# Altium PCB Load_Bank_Switch_New_PCB.PcbDoc
Units mil, origin at the board's own origin, x right, y up, seen from the top; angles counter-clockwise.
Board outline 2305 x 2010 mil, 2 copper layers (Top Layer, Bottom Layer); 50 components, 29 nets, 275 pads, 33 vias.
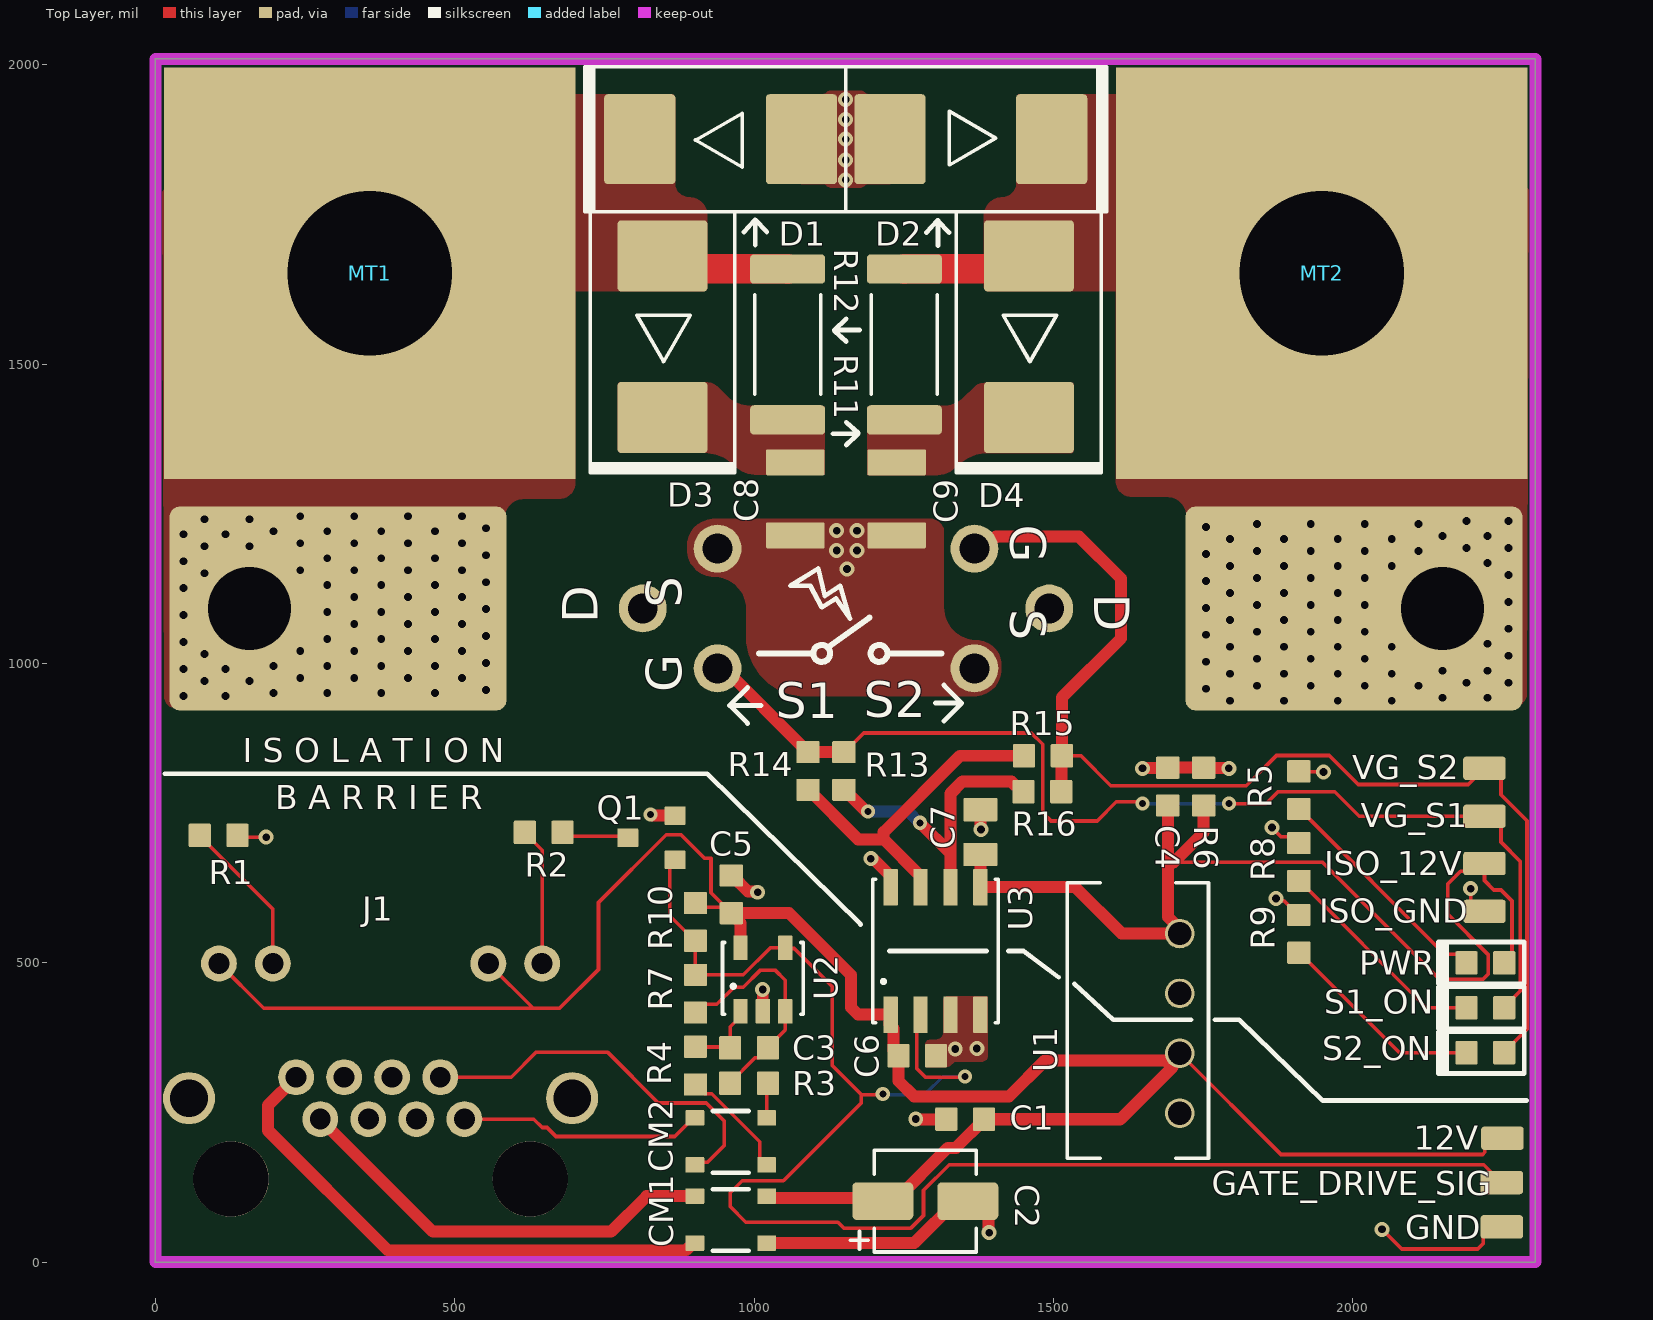
[diagram p0: Top Layer view]
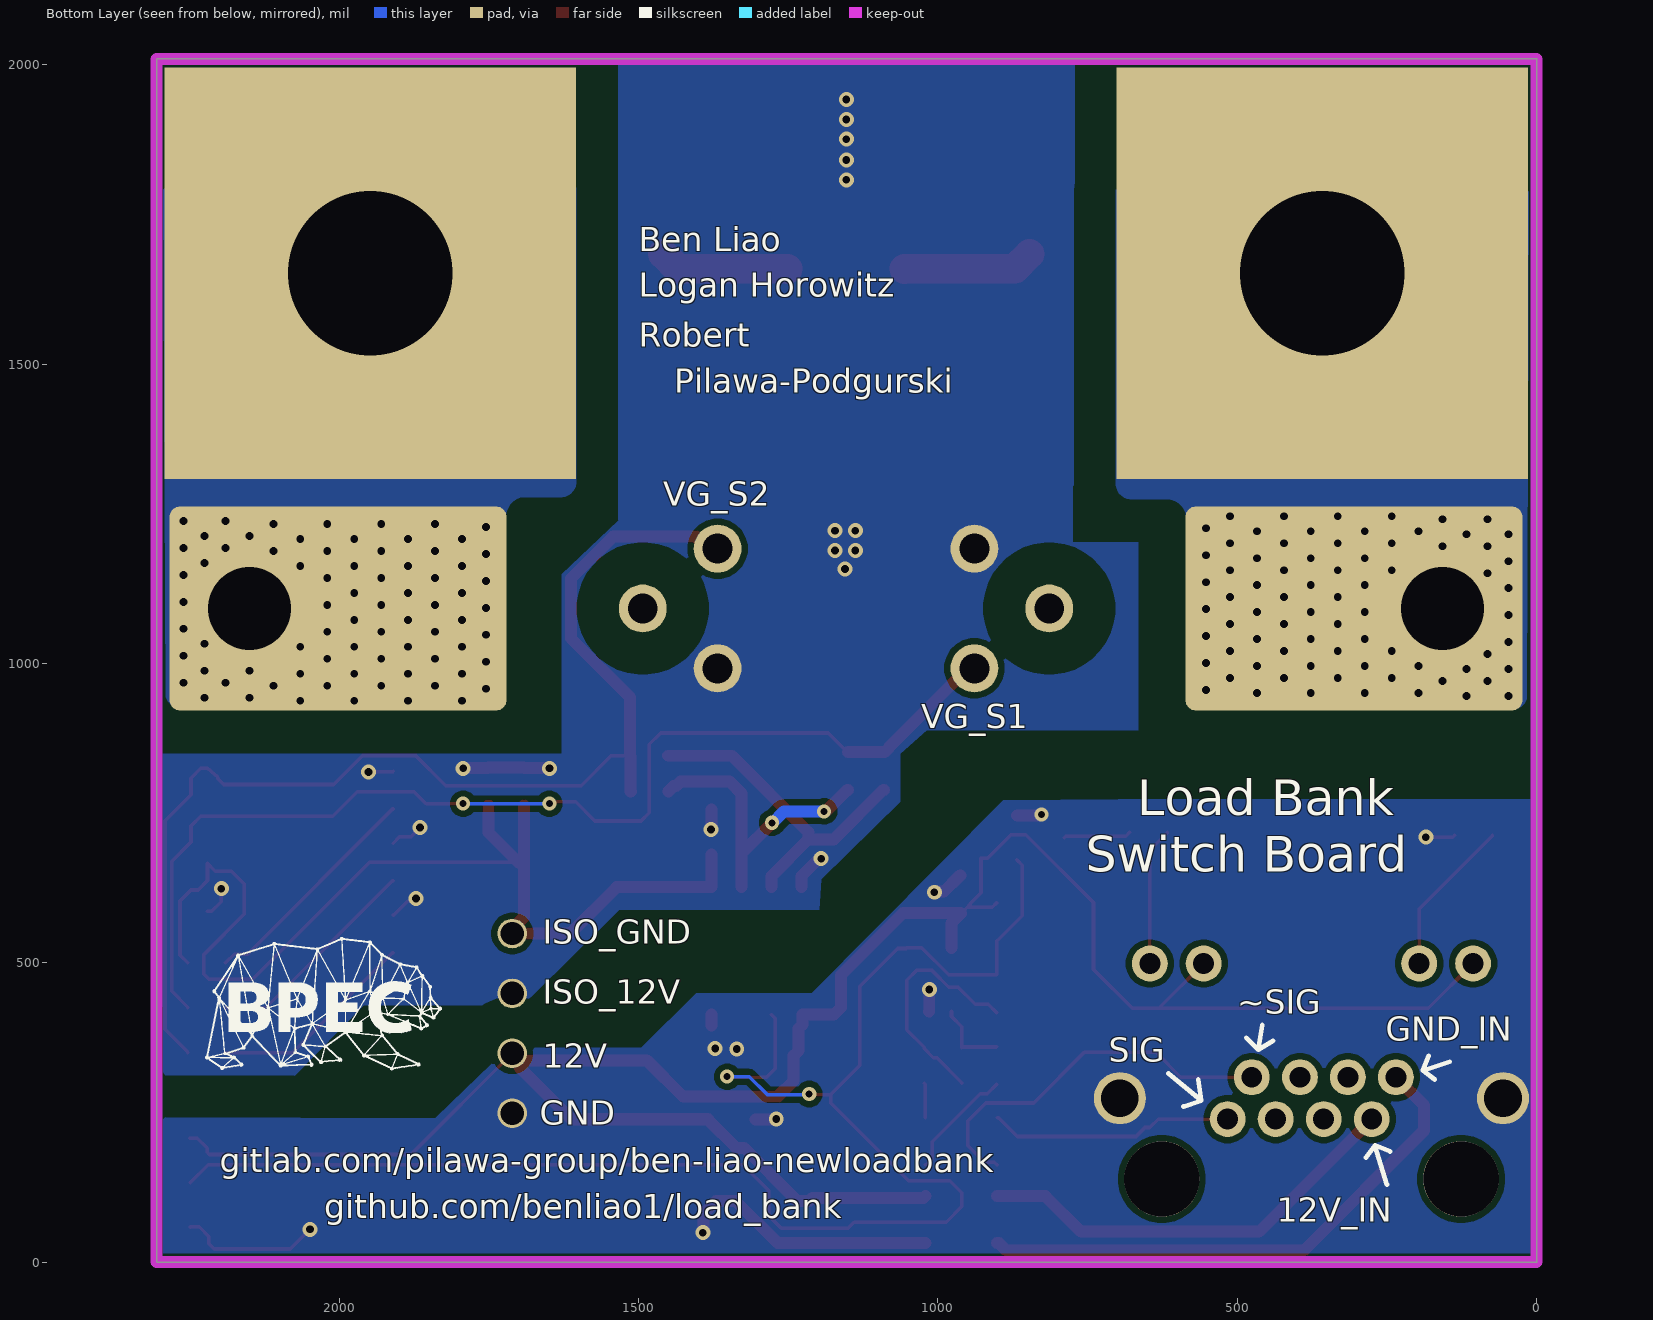
[diagram p1: Bottom Layer view, seen from below]
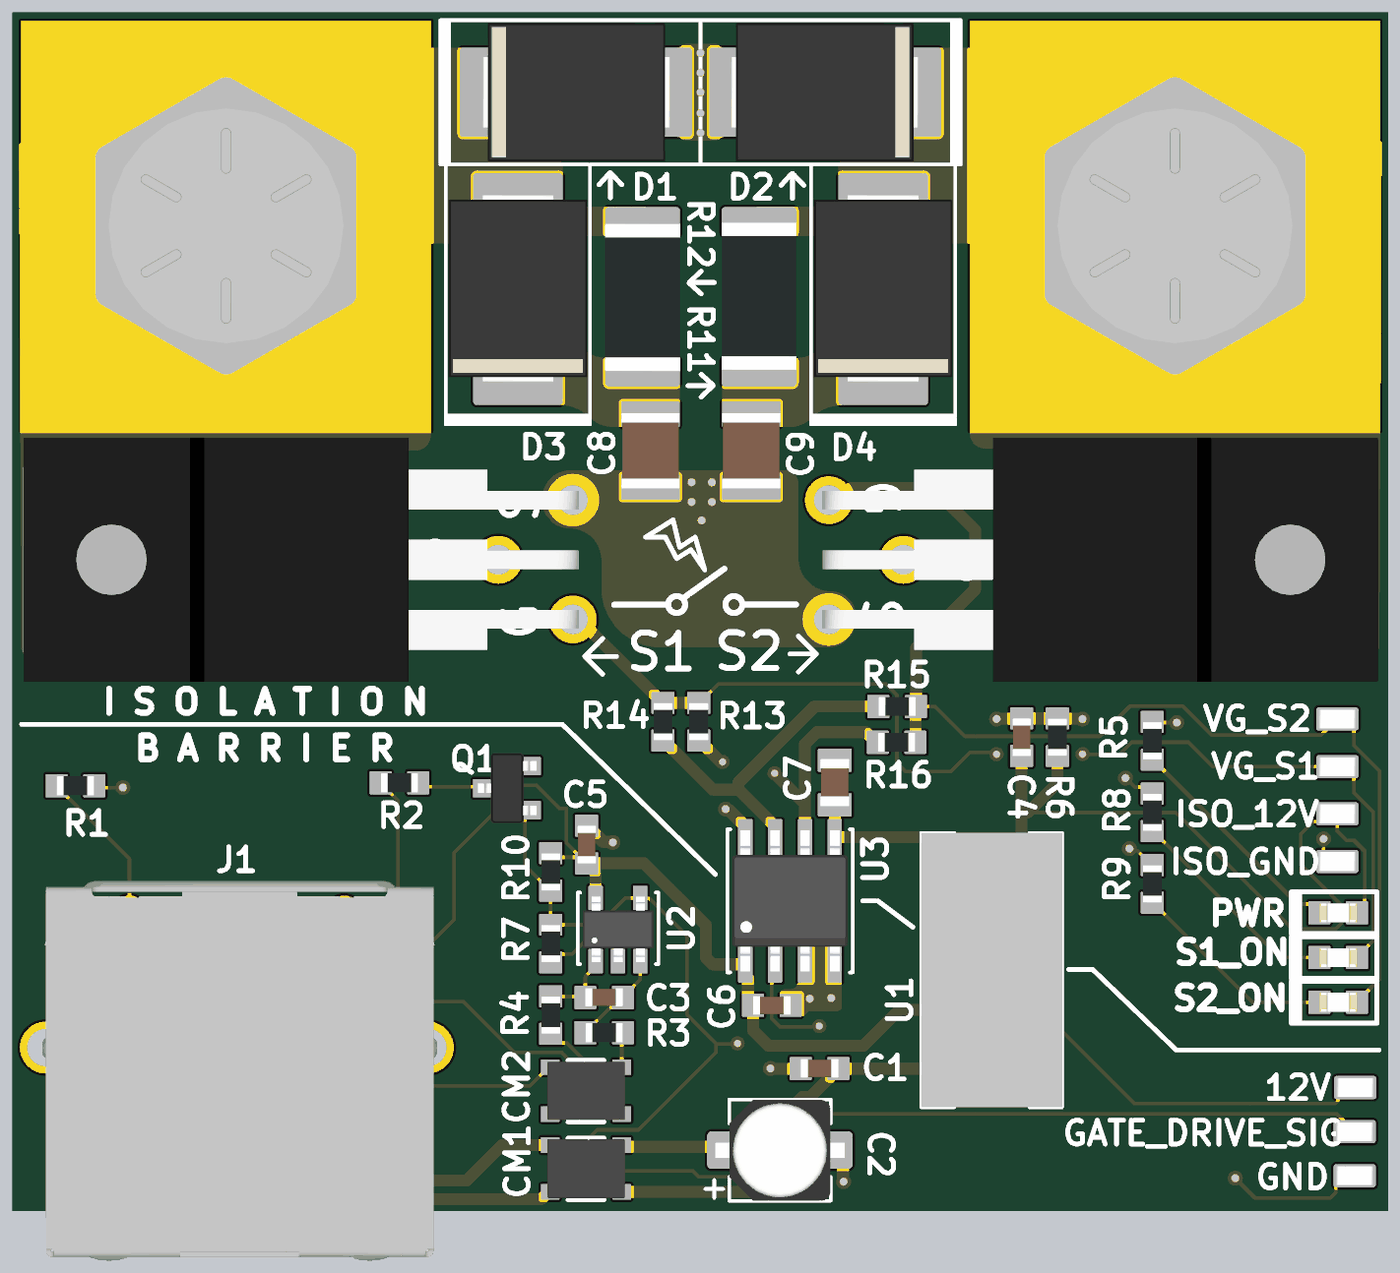
[diagram p2: 3D render of the assembled board from above, using the file's embedded part models]

## Layer stack, top to bottom
Top Solder: solder mask 0.4, Solder Resist, Dk 3.5
Top Layer: signal copper 1.378
Dielectric 1: dielectric 12.6, FR-4, Dk 4.8
Bottom Layer: signal copper 1.378
Bottom Solder: solder mask 0.4, Solder Resist, Dk 3.5

## Board outline
0,2010 0,0 2305,0 2305,2010

## Design rules (kind name [scope] priority, off if disabled: settings)
BoardOutlineClearance [All] p1: gap=9.84 ignorepadtopadclearanceinfootprint=FALSE
Clearance Clearance_HV [InNetClass('High_Voltage') vs InNetClass('High_Voltage')] p1: gap=70 ignorepadtopadclearanceinfootprint=FALSE
Clearance Clearance_HV_TO_LV [InNetClass('High_Voltage') vs InNetClass('Low_Voltage')] p2: gap=70 ignorepadtopadclearanceinfootprint=TRUE
Clearance Clearance_HV_TO_ISO [InNetClass('High_Voltage') vs InNetClass('Isolated')] p3: gap=70 ignorepadtopadclearanceinfootprint=TRUE
Clearance Clearance_ISO_TO_LV [InNetClass('Isolated') vs InNetClass('Low_Voltage')] p4: gap=70 ignorepadtopadclearanceinfootprint=TRUE
Clearance Clearance_Edge [OnLayer('Keep-Out Layer')] p5: gap=0 ignorepadtopadclearanceinfootprint=FALSE
Clearance [All] p6: gap=10 ignorepadtopadclearanceinfootprint=FALSE except(0: Arc-Hole Track-Hole SMDPad-Hole THPad-Hole Via-Hole Fill-Hole Poly-Hole Region-Hole Text-Hole; 5: Arc-Arc Arc-Track Arc-SMDPad Track-Track Track-SMDPad SMDPad-SMDPad; 5.98: SMDPad-Fill SMDPad-Poly SMDPad-Region; 7.87: Via-Via)
ComponentClearance [All] p1: gap=3.94 collisioncheckmode=3 verticalgap=3.94 showdistances=FALSE
HoleSize [All] p1: absolutevalues=TRUE maxlimit=248.03 minlimit=7.87 maxpercent=80.000 minpercent=20.000
HoleToHoleClearance [All] p1: gap=19.68 allowstackedmicrovias=TRUE
MinimumAnnularRing [All] p1: minimumring=5.12
MinimumSolderMaskSliver [All] p1 off: minsoldermaskwidth=7.87
PlaneConnect [All] p1: planeconnectstyle=Direct reliefexpansion=20 reliefentries=4 reliefconductorwidth=10 reliefairgap=10
PolygonConnect [All] p1: connectstyle=Direct reliefconductorwidth=39.37 reliefentries=4 polygonreliefangle="90 Angle" airgapwidth=9.84
RoutingVias [All] p1: holewidth=11.81 width=23.62 viastyle="Through Hole" minholewidth=11.81 minwidth=23.62 maxholewidth=248.03 maxwidth=393.7
SolderMaskExpansion [All] p1: expansion=4 istentingtop=FALSE
Width [All] p1: maxlimit=393.7 minlimit=5 preferedwidth=6
25 further rules are at their usual default settings.

## Classes and differential pairs
net class Isolated: ISO_12V ISO_GND NetR13_1 NetR14_1 VG_FET1 VG_FET2
net class Low_Voltage: +12 DRIVE_SIG GND NetC3_1 NetC3_2 NetCM1_1 NetCM1_4 NetCM2_1 NetCM2_2 NetCM2_3 NetCM2_4 NetJ1_3 NetJ1_4 NetJ1_5 NetJ1_6 NetJ1_9 NetJ1_11 NetQ1_1
net class High_Voltage: NetC8_2 NetC9_1 NetD1_1 NetD2_1 S1_D_PIN S2_D_PIN

## Components (designator, comment, footprint, x,y, rotation, side; value= is the part's Value field where it differs from the comment)
12V "TP1" 0603_TP 2250,207 r180 top
C1 "2.2uF" 0603_CAP 1321,239 r0 top
C2 "10uF" ALUM_CAP 1286,102 r180 top
C3 "220pF" 0603_CAP 960,358 r0 top
C4 "2.2uF" 0603_CAP 1691,826 r270 top
C5 "100nF" 0603_CAP 962,646 r270 top
C6 "100nF" 0603_CAP 1304,345 r180 top
C7 "10uF" 0805_CAP 1378,756 r270 top
C8 "18nF, HV" 1210_CAP 1069,1214 r90 top
C9 "18nF, HV" 1210_CAP 1238,1336 r270 top
CM1 "Choke" CHOKE 901,32 r0 top
CM2 "Choke" CHOKE 901,162.5 r0 top
D1 "D_800V" DIODE 809,1876 r270 top
D2 "D_800V" DIODE 1497,1876 r90 top
D3 "D_800V" DIODE 847,1411 r0 top
D4 "D_800V" DIODE 1459,1411 r0 top
GATE_DRIVE_SIG "TP5" 0603_TP 2249,133 r180 top
GND "TP2" 0603_TP 2249,59 r180 top
ISO_12V "TP3" 0603_TP 2220,666 r0 top
ISO_GND "TP4" 0603_TP 2220,586 r180 top
J1 "RJ45 Jack" RJ45_JACK 126,139 r0 top
MT1 "Screw" MOUNT 358,1652 r90 top
MT2 "Screw" MOUNT 1948,1652 r90 top
PWR "Red" 0603_LED 2190,500 r0 top
Q1 "Logic FET" SOT23 789,709 r270 top
R1 "3.3k" 0603_RES 137,713 r180 top
R2 "3.3k" 0603_RES 680,718 r180 top
R3 "10k" 0603_RES 1023,299 r180 top
R4 "10k" 0603_RES 902,297 r90 top
R5 "3.3k" 0603_RES 1910,820 r270 top
R6 "3.3k" 0603_RES 1751,826 r270 top
R7 "100k" 0603_RES 902,417 r90 top
R8 "3.3k" 0603_RES 1910,700 r270 top
R9 "3.3k" 0603_RES 1910,580 r270 top
R10 "3.3k" 0603_RES 902,537 r90 top
R11 "100k, 2512" 2512_RES 1251,1533 r270 top
R12 "100k, 2512" 2512_RES 1056,1533 r90 top
R13 "51" 0603_RES 1150,789 r90 top
R14 "51" 0603_RES 1090,789 r90 top
R15 "51" 0603_RES 1451,846 r0 top
R16 "51" 0603_RES 1450,786 r0 top
S1 "FET" FET 939,992 r90 top
S1_ON "Blue" 0603_LED 2190,425 r0 top
S2 "FET" FET 1368,1192 r270 top
S2_ON "Blue" 0603_LED 2190,350 r0 top
U1 "U_Power_Isolator" PWR_ISOLATOR 1711,249 r90 top
U2 "U_Comparator" COMPARATOR 977.2,419 r0 top
U3 "U_Isolated_Gate_Drive" GATE_DRIVER 1303,520 r90 top
VG_S1 "TP6" 0603_TP 2220,745 r0 top
VG_S2 "TP7" 0603_TP 2220,825 r0 top

## Footprints (in the part's own frame and the unit in brackets; to place one, negate y for a bottom-side part, rotate by r counter-clockwise, add the part's x,y. Pads: shape width x height; smd on the part's side, far side on the other; paste and mask are expansions set on the pad)
0603_CAP [mil] "SMD 0603 Capacitor Footprint"
  rrect10% 37x39 smd: 1(0,0) 2(63,0)
  body extent 0,-15 63,16, height 32
0603_LED [mil] "SMD 0603 LED Footprint"
  rrect10% 37x39 smd: 1(0,0) 2(63,0)
  silkscreen extent -47,-35 96,35, body extent 0,-16 63,16, height 43
0603_RES [mil] "SMD 0603 Resistor Footprint"
  rrect10% 37x39 smd: 1(0,0) 2(63,0)
  body extent 0,-16 63,16, height 18
0603_TP [mil] "0603 Test Point Footprint"
  rrect25% 71x39 smd: 1(0,0)
  body extent -31,-16 31,16, height 47
0805_CAP [mil] "SMD 0805 Capacitor Footprint"
  rrect10% 39x57 smd: 1(0,0) 2(75,0)
  body extent -2,-25 77,25, height 49
1210_CAP [mil] "1210 SMD Capacitor Footprint"
  rrect10% 43x98 smd: 1(0,0) 2(122,0)
  body extent -2,-49 124,49, height 98
2512_RES [mil] "2512 Resistor Footprint"
  rrect25% 49x125 smd: 1(-126,0) 2(126,0)
  silkscreen extent -83,-55 83,55, body extent -125,-63 123,63, height 24
ALUM_CAP [mil] "25 V Aluminum Electrolytic Cap"
  rrect25% 102x63 smd: 1(-71,0) 2(71,0)
  silkscreen extent -85,-85 125,85, body extent -108,-84 108,85, height 213
CHOKE [mil] "Common Mode Choke Footprint Horizontal 4"
  rrect10% 31.5x26 smd: 1(0,78.5) 2(120,78.5) 3(120,0) 4(0,0)
  silkscreen extent 30,-13 90,90, body extent -5,-10 126,88, height 73
COMPARATOR [mil] "Comparator Footprint SOT25"
  rrect10% 24x41 smd: 1(0,0) 2(37.4,0) 3(74.8,0) 4(74.8,106) 5(0,106)
  silkscreen extent -30,-5 105,115, body extent -21,-2 97,108, height 55
DIODE [mil] "Diode Footprint SMC"
  rrect10% 150x119 smd: 1(0,0) 2(0,270)
  silkscreen extent -121,-92 121,344, body extent -116,-21 116,293, height 91
FET [mil] "Power FET Footprint"
  round 80 hole 50: 1(0,0) 2(100,125) 3(200,0)
  round 25 hole 13 paste+0 mask+4: 4(-46,892) 4(-46,822) 4(-41,652) 4(-41,742) 4(-41,562) 4(-41,472) 4(-36,387) 4(-21,857) 4(-21,782) 4(-16,697) 4(-16,607) 4(-16,517) 4(-16,427) 4(-1,892) 4(-1,822) 4(4,742) 4(4,652) 4(4,562) 4(4,472) 4(9,387) 4(24,857) 4(29,697) 4(29,607) 4(29,517) 4(29,427) 4(44,892) 4(49,652) 4(49,562) 4(49,472) 4(54,387) 4(74,607) 4(74,427) 4(74,517) 4(89,892) 4(94,652) 4(94,472) 4(94,562) 4(99,387) 4(119,607) 4(119,427) 4(119,517) 4(134,892) 4(139,472) 4(139,562) 4(139,652) 4(144,387) 4(159,857) 4(164,697) 4(164,427) 4(164,517) 4(164,607) 4(179,892) 4(184,472) 4(184,562) 4(184,652) 4(189,387) 4(204,782) 4(204,857) 4(209,697) 4(209,427) 4(209,517) 4(209,607) 4(224,822) 4(224,892) 4(229,742) 4(229,472) 4(229,562) 4(229,652) 4(234,387) 4(249,782) 4(249,857) 4(254,697) 4(254,427) 4(254,517) 4(254,607)
  rrect10% 341x563 hole 138 copper offset 0,-148 paste+100: 4(100,782)
  body extent -105,-10 305,921, height 181
GATE_DRIVER [mil] "Isolated Gate Driver Footprint 8-SOIC"
  rrect10% 61x24 smd: 1(-106.5,75) 2(-106.5,25) 3(-106.5,-25) 4(-106.5,-75) 5(106.5,-75) 6(106.5,-25) 7(106.5,25) 8(106.5,75)
  silkscreen extent -120,-105 120,105, body extent -118,-97 118,97, height 69
MOUNT [mil] "Screw Mount Footprint"
  rect 687.5x687.5 hole 275 paste-99999: 1(0,0)
  body extent -251,-219 251,219, height 174
PWR_ISOLATOR [mil] "Power Isolator Footprint"
  round 49.4 hole 39: 1(0,0) 2(100,0) 3(200,0) 4(300,0)
  silkscreen extent -75,-48 385,188, body extent -75,-48 385,188, height 391
RJ45_JACK [mil] "RJ45 Jack Footprint"
  round 60 hole 35: 1(390,100) 2(349.75,170) 3(309.75,100) 4(269.25,170) 5(229.5,100) 6(189.25,170) 7(149.25,100) 8(109,170) 9(520,360) 10(430,360) 11(70,360) 12(-20,360)
  round 87 hole 63: 13(-70,135) 14(570,135)
  round 126 hole 126 unplated: ""(0,0) ""(500,0)
  body extent -76,-222 585,414, height 522
SOT23 [mil] "SOT23 Footprint"
  rrect10% 31x35 smd: 1(0,0) 2(37,79) 3(-37,79)
  body extent -59,-9 59,89, height 47

## Part data
12V GATE_DRIVE_SIG GND ISO_12V ISO_GND VG_S1 VG_S2: library part TP_TestPoint, "Test Point 0603"
C1 C4: library part C_2.2uF_0603, "Capacitor SMD MLCC 2.2 uF 0603"
C2: library part C_10uF_AlElec, "Capacitor SMD Aluminum Electrolytic 10 uF"
C3: library part C_220pF_0603, "Capacitor SMD MLCC 220 pF 0603 5%"
C5 C6: library part C_100nF_0603, "Capacitor SMD MLCC 100 nF 0603"
C7: library part C_10uF_0805, "Capacitor SMD MLCC 10 uF 0805"
C8 C9: library part C_18nF_1210_1kV, "Capacitor SMD MLCC C0G 18 nF 1 kV 1210"
CM1 CM2: library part CM_Common_Mode_Choke, "Common Mode Choke"
D1 D2 D3 D4: "Diode 800 V 8 A diode"
J1: library part J_RJ45_Jack, "Jack RJ-45 8-pin"
MT1 MT2: library part MT_Screw, "Screw Mount for connecting board to resistors"
PWR: library part LED_0603_Red, "LED SMD 0603 Red"
Q1: library part Q_NFET, "N-Channel Logic FET SOT23-3"
R1 R2 R5 R6 R8 R9 R10: library part R_3300Ohm_0603_1%, "Resistor 3.3 kOhm 0603 1%"
R3 R4: library part R_10kOhm_0603_1%, "Resistor 10 kOhm 0603 1%"
R7: library part R_100kOhm_0603_5%, "Resistor 100 kOhm 0603 5%"
R11 R12: library part R_100kOhm_2512_5%, "Resistor 100 kOhm 2512 5%"
R13 R14 R15 R16: library part R_51Ohm_0603_1%, "Resistor 51 Ohm 0603 1%"
S1 S2: library part S_PowerFET, "N-Channel Power FET 650 V 24 A"
S1_ON S2_ON: library part LED_0603_Blue, "LED SMD 0603 Blue"
U1: "IC Power Isolator 12V-12V DC-DC Converter"
U2: "IC Comparator 36 V 300 ns Response Open-Collector"
U3: "IC Isolated Gate Drive 3-15 V Output Supply Split Output"

## Via types
v1: diameter 25, hole 13, Top Layer to Bottom Layer, tented top, 26 vias
v2: diameter 23.62, hole 11.81, Top Layer to Bottom Layer, tented top, 6 vias
v3: diameter 23.62, hole 11.81, Top Layer to Bottom Layer, 1 vias

## Nets (pads, with @x,y where several pads share a name; then routed paths per layer and width w, separated by ;. In a path a pad name is that pad's centre, name@x,y a point inside that pad or via, vN(x,y) a via of type N, cw(c..) or ccw(c..) an arc to the next point about the centre after c; other vN are vias at no path point)
+12: 12V.1 C1.2 C2.2 C5.2 C6.2 CM1.2 J1.10 J1.12 R10.2 U1.2 U2.5 U3.1 | length 3989.2
  Top Layer w6: J1.12 181,424 631,424 ; J1.10 631,424 ; R10.2 909,593 C5.2@951,593 ; C5.2 961,583 C5.2@951,593 ; U1.2 1880,180 2217.1,180 2220.61,183.51 2220.61,190.64 2236.97,207 12V.1 ; 631,424 675,424 740,489 740,601 853,714 878,714 917,675 928,675 928,617 945.5,599.5 945.5,598.5 C5.2@951,593
  Top Layer w20: C5.2@961.5,582.5 977.2,566.8 U2.5 ; C5.2 1058.5,583 1162,479.5 1162,425.22 1173.72,413.5 U3.1@1226,413.5 ; CM1.2 1024,107.5 1209.5,107.5 C2.2 1234.5,102 1323.5,191 1337,191 1384,238 1611,238 1612,239 ; U3.1@1226,411.5 1226,397 1232.5,390.5 1232.5,353.5 C6.2 1241,303 1267,277 1426,277 1486,337 1688,337 1699,326 1612,239 ; C1.2 1612,239
DRIVE_SIG: GATE_DRIVE_SIG.1 Q1.2 R7.2 R10.1 U2.4 U3.2 | length 2757.2
  Top Layer w6: Q1.2 859,663 859,579 901,537 R10.1 R7.2 982,480 1027,525 U2.4 1053,524 1067,524 1130.5,460.5 1130.5,328.5 1179,280 ; v2(1215,281) 1214,280 1179,280 ; U3.2 1272,407.5 1272,323 1286.19,308.81 1350.81,308.81 v2(1352,310) ; GATE_DRIVE_SIG.1 2219,163 1326,163 1283,120 1283,78 1262,57 1150,57 1140,67 986,67 960,93 960,116 980,136 1049,136 1179,266 1179,280
  Bottom Layer w6: v2(1215,281) 1216,280 1285,280 1315,310 v2(1352,310)
GND: C1.1 C2.1 C5.1 C6.1 CM1.3 GND.1 J1.13 J1.14 Q1.3 R1.1 U1.1 U2.2 U3.3 U3.4 | length 914.4
  Top Layer w6: R1.1 140,710 v1(185,710) ; v1(2049,55) 2082,22 2209,22 2217.66,30.66 2217.66,42.64 2234.01,59 GND.1 GND.1@2248.51,58.51
  Top Layer w20: v3(827,748) 827.98,748 829.98,746 Q1.3 ; C5.1 963,646 990.04,618.96 1005.04,618.96 v1(1006,618) ; v1(1014.3,455.68) 1014.45,455.53 1014.45,419.15 U2.2 ; CM1.3 1267.5,32 1337.5,102 C2.1 1370.29,102 1391.79,80.5 1391.79,50.21 v1(1392.75,49.25) ; v1(1270,239) 1270.5,238.5 1304.5,238.5 C1.1@1305,238 ; U3.4@1378,395 U3.4
  other v1: 1336,356 1372,357
ISO_12V: C4.2 C7.2 ISO_12V.1 PWR.2 R6.2 U1.4 U3.5 | length 1832.5
  Top Layer w6: 1691,658.19 1700.81,668 1949.5,668 2145,472.5 2217.5,472.5 2226,481 2226,514 2159,581 2159,632 2180.06,653.06 2207.06,653.06 ISO_12V.1 2220,637.5 2235.77,621.73 2247.73,621.73 2266,603.46 2266,513 PWR.2
  Top Layer w20: C7.2 U3.5 1536.5,626.5 1614,549 U1.4 1711,556.96 1691,576.96 1691,658.19 C4.2 ; 1700.81,668 1751,718.19 R6.2
ISO_GND: C4.1 C7.1 C8.1 C9.2 D1.2 D2.2 ISO_GND.1 R5.1 R6.1 R8.1 R9.1 S1.3 S2.3 U1.3 U3.8 | length 440.2
  Top Layer w6: v1(1865,726) 1880.2,710.8 1899.2,710.8 R8.1 ; v1(1871.59,607.62) 1875.23,603.98 1885.02,603.98 1909,580 R9.1 ; R5.1 1911,819 v1(1951,819) ; v1(2197,624) 2197,602.36 2213.36,586 ISO_GND.1
  Top Layer w20: v1(1195,674) 1195.96,673.04 1199.96,673.04 1228,645 U3.8 ; C7.1 1378.5,755.5 1378.5,723.5 v1(1379,723) ; v1(1649,825) 1649.5,825.5 1690.5,825.5 C4.1 R6.1 1751.5,825.5 1792.5,825.5 v1(1793,825)
  other v1: 1155,1158 1138,1189 1172,1189 1138,1222 1172,1222 1153,1808 1153,1841 1153,1876 1153,1909 1153,1942
NetC3_1: C3.1 R4.2 U2.1 | length 127
  Top Layer w6: R4.2 902.5,359.5 958.5,359.5 C3.1 960,393.3 977.2,410.5 U2.1
NetC3_2: C3.2 R3.2 R7.1 U2.3 | length 400.1
  Top Layer w6: R7.1 915.65,430.65 937.65,430.65 966.33,459.33 981.88,459.33 1010.56,488 1035,488 1052,471 U2.3 1052,388 1023,359 C3.2 1023,357 1007.5,341.5 1001.5,341.5 960,300 R3.2
NetC8_2: C8.2 D3.1 R12.1
NetC9_1: C9.1 D4.1 R11.2
NetCM1_1: CM1.1 J1.7 | length 728.3
  Top Layer w20: J1.7 463.25,51 761,51 820.5,110.5 CM1.1
NetCM1_4: CM1.4 J1.8 | length 909.3
  Top Layer w20: J1.8 188,262 188,220 388,20 886.25,20 898.25,32 CM1.4
NetCM2_1: CM2.1 J1.1 | length 415.9
  Top Layer w6: J1.1@510,239 J1.1 632,239 646,225 654,225 669,210 867.25,210 898.25,241 CM2.1
NetCM2_2: CM2.2 R3.1 | length 58.8
  Top Layer w6: CM2.2 1021,297 R3.1
NetCM2_3: CM2.3 R4.1 | length 191.5
  Top Layer w6: R4.1 917.5,281.5 929.27,281.5 1009.55,201.22 1009.55,172.5 1019.55,162.5 CM2.3
NetCM2_4: CM2.4 J1.2 | length 648.7
  Top Layer w6: J1.2@469.75,309 J1.2 594.13,309 636.13,351 755,351 840,266 920,266 950,236 950,195 922.24,167.24 905.74,167.24 CM2.4
NetD1_1: D1.1 D3.2 MT1.1 R12.2 S1.4 | length 219.4
  Top Layer w50: D3.2@847,1684 871.5,1659.5 1055.5,1659.5 R12.2
NetD2_1: D2.1 D4.2 MT2.1 R11.1 S2.4 | length 218.4
  Top Layer w50: R11.1 1251.5,1659.5 1434.5,1659.5 D4.2@1459,1684
NetJ1_9: J1.9 R2.2 | length 231
  Top Layer w6: R2.2 617,717 646,688 J1.9
NetJ1_11: J1.11 R1.2 | length 264.5
  Top Layer w6: R1.2 74,712 196,590 J1.11
NetPWR_1: PWR.1 R5.2 | length 386.5
  Top Layer w6: R5.2 1911,757 2153.35,514.65 2175.35,514.65 PWR.1
NetQ1_1: Q1.1 R2.1 | length 112.7
  Top Layer w6: R2.1 686.35,711.65 786.35,711.65 Q1.1
NetR8_2: R8.2 S1_ON.1 | length 367.8
  Top Layer w6: R8.2 1911,637 2123,425 S1_ON.1
NetR9_2: R9.2 S2_ON.1 | length 349.2
  Top Layer w6: R9.2 1911,517 2078,350 S2_ON.1
NetR13_1: R13.1 R16.1 U3.6 | length 516.3
  Top Layer w20: R13.1 1151,789 1186.31,753.69 1189.31,753.69 v2(1190,753) ; v2(1277,734) 1328,683 ; U3.6 1328,683 ; R16.1 1450,787 1441.5,795.5 1437.28,795.5 1429.78,803 1348,803 1328,783 1328,683
  Bottom Layer w20: v2(1190,753) 1257.02,753 1276.02,734 v2(1277,734)
NetR14_1: R14.1 R15.1 U3.7 | length 565.5
  Top Layer w20: R14.1 1091,789 1173.5,706.5 1216.5,706.5 ; U3.7 1278,645 1216.5,706.5 ; R15.1 1344.01,846 1216.5,718.49 1216.5,706.5
S1_D_PIN: S1.2
S2_D_PIN: S2.2
VG_FET1: R13.2 R14.2 S1.1 S1_ON.2 VG_S1.1 | length 1882.9
  Top Layer w6: R13.2 1151,852 1183,884 1463,884 1482,865 1482,751 1496,737 1573,737 1605,769 1646,769 v2(1649,766) ; v2@1792.31,766 v2(1793,766) 1855,766 1875,786 1970,786 2011,745 2231.27,745 2247.62,728.64 2247.62,701.83 2280,669.46 2280,453 2253,426 S1_ON.2
  Top Layer w20: S1.1 950,992 1080.5,861.5 1080.5,860.5 1089,852 R14.2 R13.2
  Bottom Layer w6: v2(1649,766) v2@1792.31,766
VG_FET2: R15.2 R16.2 S2.1 S2_ON.2 VG_S2.1 | length 1985.3
  Top Layer w6: R15.2 1546,846 1596,796 1822.08,796 1872.58,846.5 1960.48,846.5 2008.98,798 2193,798 2202.89,807.89 2202.89,810.38 VG_S2.1 2231.27,825 2247.62,808.64 2247.62,780.83 2291,737.46 2291,389 2253,351 S2_ON.2
  Top Layer w20: S2.1 1384.24,1192 1404.24,1212 1542.71,1212 1613,1141.71 1613,1042.29 1514,943.29 R15.2 ; R16.2 1513.5,786.5 R15.2@1513.5,845.5
pads on no net: J1. J1.3 J1.4 J1.5 J1.6

## Polygon pours and split planes (outlines as drawn)
GND on Bottom Layer "GND_L02_P008" (solid, pour order 8): 8.31,15 9.31,16 9.31,773 699,773 891.16,771.92 1210.91,449 1403.24,449 1495.93,358 1717.43,358 1839.95,240.84 2294.31,242 2294.31,15
ISO_GND on Bottom Layer "ISO_GND_L02_P009" (solid, pour order 9): 703,1999 706.07,1298.93 775.06,1296.59 775.06,1203 665.44,1203 665.44,889 1019,889 1063,849 1063,769 1195,640 1198,589 1532.2,589 1694.04,429.41 1960.26,428.38 2088,298 2294,298 2295.87,849 1628,849 1628,1149 1533,1239 1599,1304 1602,2000
NetD2_1 on Bottom Layer "NETD2_1_L02_P005" (solid, pour order 5): 2294,1795 1604,1795 1604,1304 ccw(c1630,1304) 1630,1278 1689,1278 cw(c1689,1245) 1722,1245 1722,956 ccw(c1750,956) 1750,928 2269,928 ccw(c2269,949) 2290,949
NetD1_1 on Bottom Layer "NETD1_1_L02_P006" (solid, pour order 6): 12.62,1791.38 702.62,1791.38 702.62,1300.38 cw(c676.62,1300.38) 676.62,1274.38 617.62,1274.38 ccw(c617.62,1241.38) 584.62,1241.38 584.62,952.38 cw(c556.62,952.38) 556.62,924.38 37.62,924.38 cw(c37.62,945.38) 16.62,945.38
GND on Top Layer "GND_L01_P033" (solid, pour order 33): 1286,364 cw(c1294,364) 1294,372 1304,372 ccw(c1304,384) 1316,384 1316,443 cw(c1318.41,440.59) 1318.41,444 1389,444 cw(c1386.59,441.59) 1390,441.59 1390,342.83 cw(c1383.17,342.83) 1388,338 cw(c1380.76,345.24) 1380.76,335 1337,335 ccw(c1337,330.17) 1333.59,333.59 1329.54,329.54 cw(c1321,338.07) 1321,326 1286,326
ISO_GND on Top Layer "ISO_GND_L01_P029" (solid, pour order 29): 1227,1876 1227,1951 1192.24,1951 cw(c1192.24,1961.24) 1185,1954 ccw(c1177.76,1946.76) 1177.76,1957 1153,1957 1153,1876
ISO_GND on Top Layer "ISO_GND_L01_P030" (solid, pour order 30): 1227,1876 1227,1801 1192.24,1801 ccw(c1192.24,1790.76) 1185,1798 cw(c1177.76,1805.24) 1177.76,1795 1153,1795 1153,1876
ISO_GND on Top Layer "ISO_GND_L01_P031" (solid, pour order 31): 1079,1876 1079,1801 1113.76,1801 cw(c1113.76,1790.76) 1121,1798 ccw(c1128.24,1805.24) 1128.24,1795 1153,1795 1153,1876
ISO_GND on Top Layer "ISO_GND_L01_P028" (solid, pour order 28): 1079,1876 1079,1951 1113.76,1951 ccw(c1113.76,1961.24) 1121,1954 cw(c1128.24,1946.76) 1128.24,1957 1153,1957 1153,1876
NetC8_2 on Top Layer "NETC8_2_L01_P025" (solid, pour order 25): 1117,1315 1005.63,1315 cw(c1005.63,1369.63) 967,1331 ccw(c916.3,1280.3) 916.3,1352 777.41,1352 cw(c777.41,1355.41) 775,1353 cw(c782.24,1360.24) 772,1360.24 772,1464.17 cw(c778.83,1464.17) 774,1469 cw(c776.41,1466.59) 776.41,1470 920,1470 cw(c920,1441.03) 940.49,1461.51 956,1446 ccw(c992.21,1482.21) 992.21,1431 1112.17,1431 cw(c1112.17,1424.17) 1117,1429 cw(c1114.59,1426.59) 1118,1426.59 1118,1316
NetC9_1 on Top Layer "NETC9_1_L01_P026" (solid, pour order 26): 1190.02,1314.49 1301.4,1314.49 ccw(c1301.4,1369.11) 1340.02,1330.49 cw(c1390.72,1279.79) 1390.72,1351.49 1529.61,1351.49 ccw(c1529.61,1354.9) 1532.02,1352.49 ccw(c1524.78,1359.73) 1535.02,1359.73 1535.02,1463.66 ccw(c1528.2,1463.66) 1533.02,1468.49 ccw(c1530.61,1466.07) 1530.61,1469.49 1387.02,1469.49 ccw(c1387.02,1440.52) 1366.54,1461 1351.02,1445.49 cw(c1314.81,1481.7) 1314.81,1430.49 1194.85,1430.49 ccw(c1194.85,1423.66) 1190.02,1428.49 ccw(c1192.44,1426.07) 1189.02,1426.07 1189.02,1315.49
ISO_GND on Top Layer "ISO_GND_L01_P010" (solid, pour order 10): 1413,991 cw(c1367.01,990.99) 1367,945 1087,945 cw(c1087,1044.99) 987,1045 987,1091 ccw(c933,1091) 933,1145 cw(c933,1189.99) 888,1190 888,1199 cw(c934.36,1195.48) 934.44,1241.96 ccw(c1110.98,98963.17) 1294.46,1241.98 cw(c1294.5,1219.43) 1317,1221 1317,1094 ccw(c1372,1094) 1372,1039 cw(c1372,998) 1413,998
NetD2_1 on Top Layer "NETD2_1_L01_P012" (solid, pour order 12): 1951,1800 1829.29,1921.71 ccw(c1758.58,1851) 1758.58,1951 1441,1951 ccw(c1448.24,1943.76) 1438,1943.76 1438,1802 cw(c1415,1802) 1415,1779 ccw(c1415,1748) 1384,1748 1384,1629 ccw(c1391,1629) 1391,1622 1950.04,1622
NetD1_1 on Top Layer "NETD1_1_L01_P011" (solid, pour order 11): 355,1800 476.71,1921.71 cw(c547.42,1851) 547.42,1951 865,1951 cw(c857.76,1943.76) 868,1943.76 868,1802 ccw(c891,1802) 891,1779 cw(c891,1748) 922,1748 922,1629 cw(c915,1629) 915,1622 355.96,1622
NetD1_1 on Top Layer "NETD1_1_L01_P004" (solid, pour order 4): 11,1792 701,1792 701,1301 cw(c675,1301) 675,1275 616,1275 ccw(c616,1242) 583,1242 583,953 cw(c555,953) 555,925 36,925 cw(c36,946) 15,946
NetD2_1 on Top Layer "NETD2_1_L01_P007" (solid, pour order 7): 2294.38,1795.38 1604.38,1795.38 1604.38,1304.38 ccw(c1630.38,1304.38) 1630.38,1278.38 1689.38,1278.38 cw(c1689.38,1245.38) 1722.38,1245.38 1722.38,956.38 ccw(c1750.38,956.38) 1750.38,928.38 2269.38,928.38 ccw(c2269.38,949.38) 2290.38,949.38

## Keep-outs
Keep-Out Layer:
  the board outline again, w20

## Silkscreen, mask and mechanical layers (free items; w line width, h text height)
Top Overlay:
  circle w10: c1208.84,1016.94 r14.14
  circle w10: c1112.98,1016.94 r14.14
  lines w8: 15.46,816 921.42,816 1177.92,564.34 ; 983,1721 1001,1741 ; 989,900 959,930 ; 989,960 959,930 ; 1002,1699 1002,1741 1021,1721 ; 1012,930 959,930 ; 1132,1384 1174,1384 1154,1365 ; 1134,1556 1154,1538 ; 1154,1403 1174,1385 ; 1154,1576 1134,1557 1176,1557 ; 1226,520 1388,520 ; 1288,1720 1306,1740 ; 1303,934 1347,934 ; 1307,1698 1307,1740 1326,1720 ; 1317,904 1347,934 ; 1317,964 1347,934 ; 1425,520 1450,520 1508.72,475.96 ; 1535,465 1600,405 1730,405 ; 1770,405 1810,405 1950,270 2290,270 ; 1060.98,1129.94 1093.98,1129.94 1112.98,1093.94 1136.98,1108.94 1159.98,1074.94 1143.98,1129.94 1117.98,1112.94 1106.98,1158.94 1060.98,1129.94
  lines w10: 1008.25,1016.68 1098.25,1016.68 ; 1122.98,1026.94 1192.98,1076.94 ; 1222.98,1016.94 1312.98,1016.94
  text "I S O L A T I O N" at 146,835 h40
  text "B A R R I E R" at 200,757 h40
Bottom Overlay:
  drawing of 13 lines, arcs and shapes, not listed
  text "Ben Liao" at 1500,1689 h40
  text "Logan Horowitz" at 1500,1612.33 h40
  text "Robert" at 1500,1529 h40
  text "Pilawa-Podgurski" at 1440,1452.33 h40
  text "VG_S2" at 1459,1263.66 h40
  text "VG_S1" at 1028,891.66 h40
  text "Load Bank" at 667,747 h60
  text "Switch Board" at 753,652 h60
  text "ISO_GND" at 1660,531.66 h40
  text "ISO_12V" at 1660,431.66 h40
  text "~SIG" at 500,415 h40
  text "GND_IN" at 252,369.66 h40
  text "SIG" at 715,335 h40
  text "12V" at 1660,325 h40
  text "GND" at 1665,230 h40
  text "gitlab.com/pilawa-group/ben-liao-newloadbank" at 2200,150.33 h40
  text "github.com/benliao1/load_bank" at 2025,73.33 h40
  text "12V_IN" at 434,67.66 h40

## Text inside footprints (layer, text, board x,y; h text height)
S1: Top Overlay "D" at 739,1067 h60 r90; Top Overlay "G   S" at 879,952 h60 r90
S2: Top Overlay "G   S" at 1428,1232 h60 r270; Top Overlay "D" at 1568,1117 h60 r270